# Altium PCB tsc2r.PcbDoc
Units mm, origin at the board's own origin, x right, y up, seen from the top; angles counter-clockwise.
Board outline 151 x 86.38 mm, 2 copper layers (Top Layer, Bottom Layer); 19 components, 21 nets, 67 pads, 0 vias.
Unrouted connection lines stored in the file: 14.
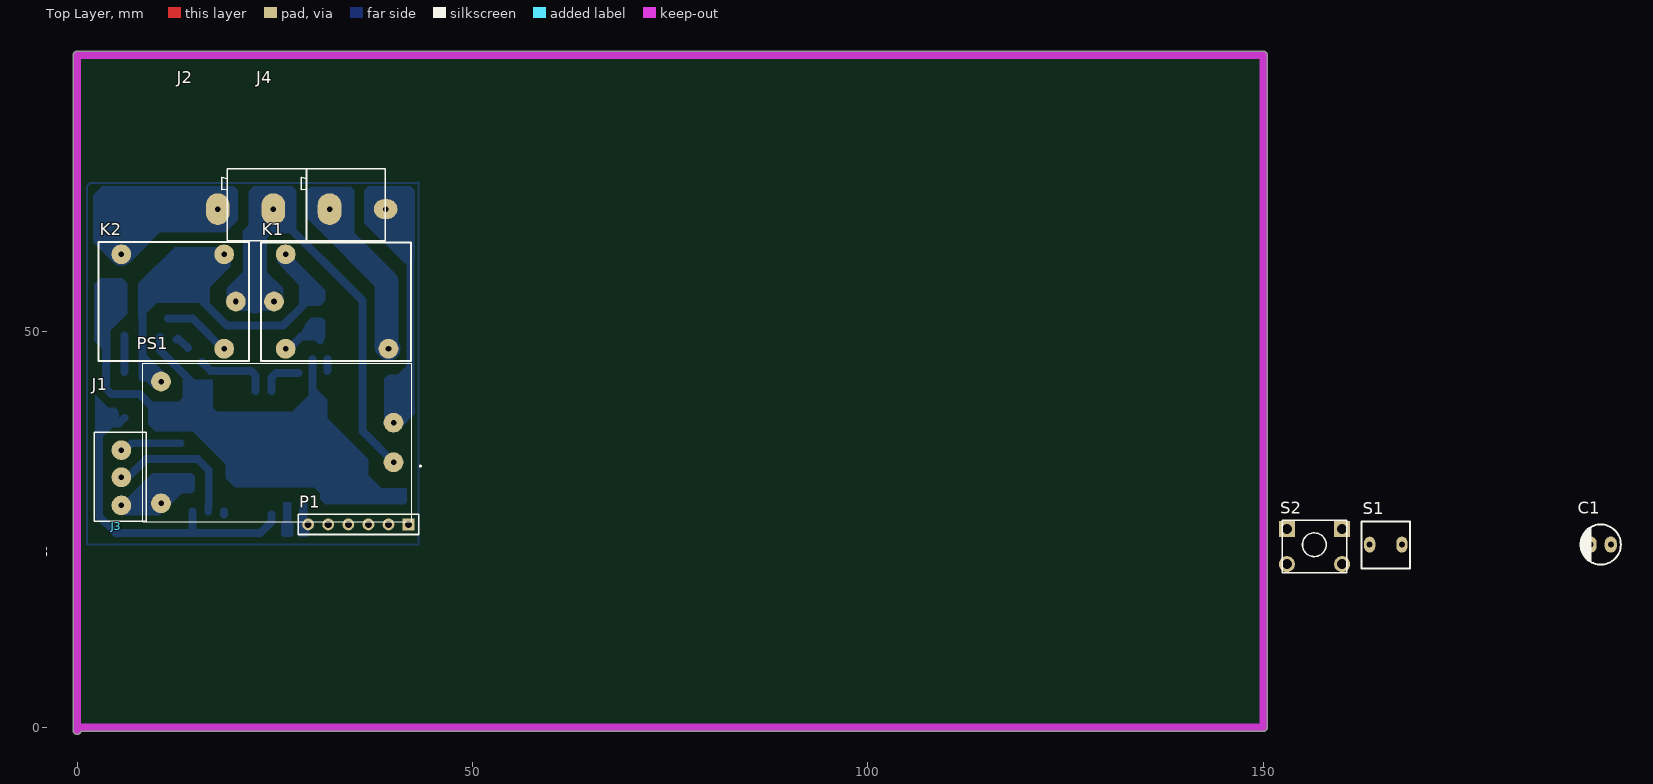
[diagram p0: Top Layer view]
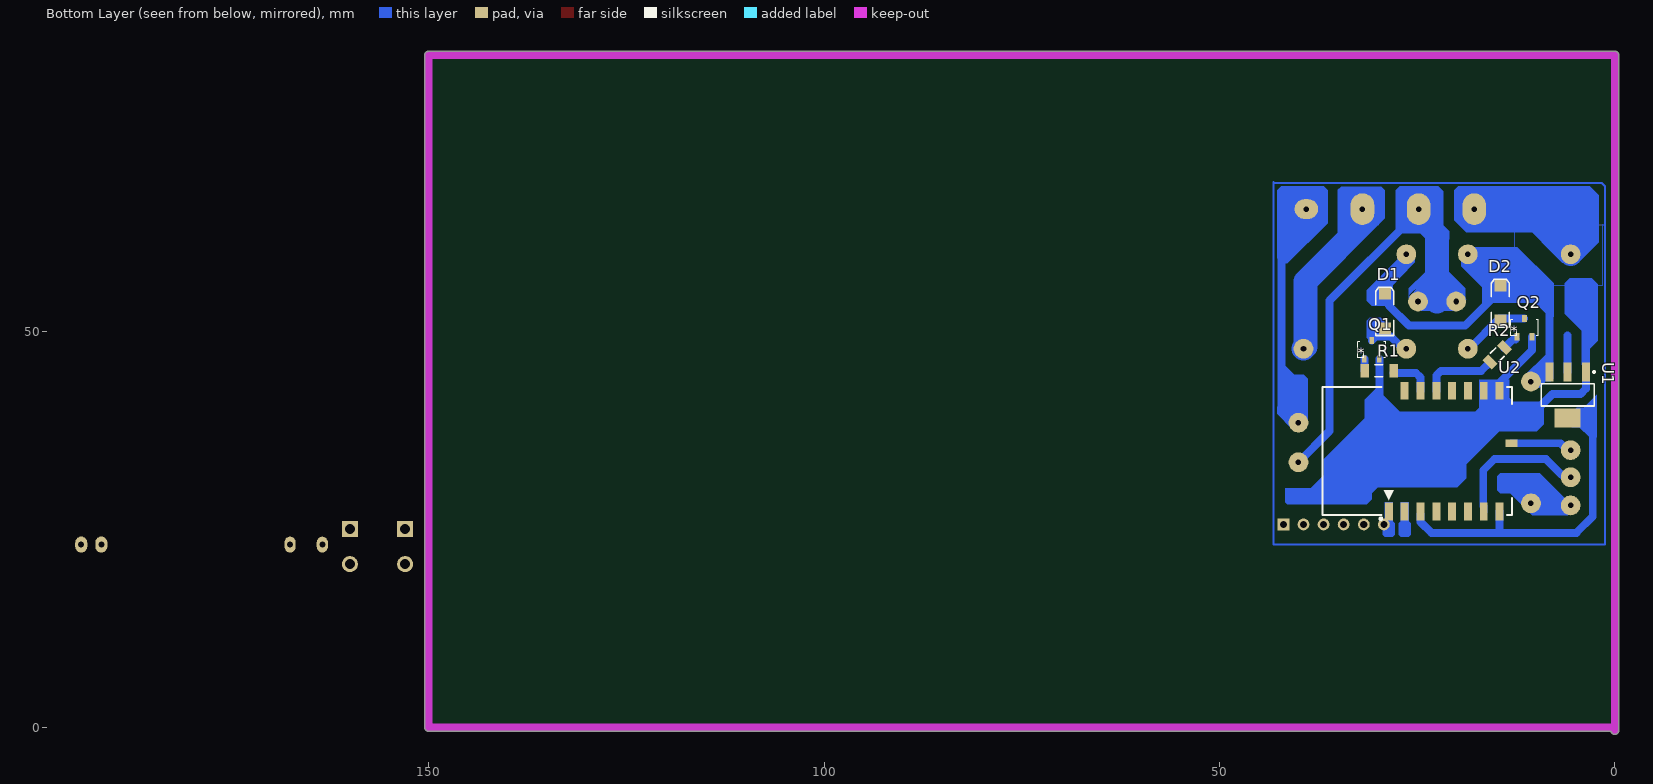
[diagram p1: Bottom Layer view, seen from below]

## Layer stack, top to bottom
Top Solder: solder mask 0.0102, Solder Resist, Dk 3.5
Top Layer: signal copper 0.0356
Dielectric 1: dielectric 0.32, FR-4, Dk 4.8
Bottom Layer: signal copper 0.0356
Bottom Solder: solder mask 0.0102, Solder Resist, Dk 3.5

## Board outline
-0.5,-0.381 -0.5,85 cw(c0,85) 0,85.5 150,85.5 cw(c150,85) 150.5,85 150.5,0 cw(c150,0) 150,-0.5 0.486,-0.5 cw(c0,-0.381)

## Design rules (kind name [scope] priority, off if disabled: settings)
Clearance Clearance_1 [InPolygon] p1: gap=0.8 ignorepadtopadclearanceinfootprint=FALSE
Clearance [All] p2: gap=0.254 ignorepadtopadclearanceinfootprint=FALSE except(0: Arc-Hole Track-Hole SMDPad-Hole THPad-Hole Via-Hole Fill-Hole Poly-Hole Region-Hole Text-Hole)
PolygonConnect [All] p1: connectstyle=Relief reliefconductorwidth=0.254 reliefentries=4 polygonreliefangle="90 Angle" airgapwidth=0.254
RoomDefinition tsc2r [InComponentClass('tsc2r')] p1: confinementstyle=ConfineIn formatcopy=TRUE lockcomponents=FALSE outline 144.907,-4.953 247.904,-4.953 247.904,23.114 144.907,23.114
RoutingLayers [All] p1: top layer_v5=FALSE bottom layer_v5=TRUE
RoutingVias [All] p1: holewidth=0.711 width=2.5 viastyle="Through Hole" minholewidth=0.711 minwidth=1.27 maxholewidth=0.711 maxwidth=2
SolderMaskExpansion [All] p1: expansion=0.102 istentingtop=FALSE
Width [All] p1: maxlimit=3 minlimit=0.5 preferedwidth=1
29 further rules are at their usual default settings.

## Components (designator, comment, footprint, x,y, rotation, side; value= is the part's Value field where it differs from the comment)
C1 "=Value" ELEC-CAP-RAD10-20 192.659,23.114 r0 top
D1 "D Tunnel1" 3.2X1.6X1.1 29.083,52.451 r90 bottom
D2 "D Tunnel1" 3.2X1.6X1.1 14.478,53.467 r90 bottom
J1 "TBlock-3" "KF300-3 PIN" 5.588,38.608 r0 top
J2 "TBlock-2" "KF300-2 PIN"#1 21.463,65.532 r90 top
J3 "TBlock-4" "KF300-4 PIN" 4.953,25.4 r180 top
J4 "TBlock-2" "KF300-2 PIN"#2 31.496,65.532 r90 top
K1 "Relay-12vDC" Relays 23.241,61.341 r270 top
K2 "Relay-12vDC" Relays 21.717,46.355 r90 top
P1 "Header 6" HDR1X6 41.91,25.654 r180 top
PS1 "HLK-PM01" HLKPM01 40.005,33.528 r180 top
Q1 "MMBT3904-TP" SOT23-3 32.004,47.745 r180 bottom
Q2 "MMBT3904-TP" SOT23-3 12.7,50.539 r180 bottom
R1 "10K" "RES 1206 (3216X08L)"#1 29.845,45.085 r0 bottom
R2 "10K" "RES 1206 (3216X08L)"#2 14.859,47.117 r135 bottom
S1 "PB-2pin" PB-2pin 162.433,20.066 r0 top
S2 "PUSH BUTTON DOUBLE" "PUSH BUTTON" 156.464,22.86 r0 top
U1 "LM1117MP-3.3" MP04A_N 5.969,42.037 r270 bottom
U2 "ESP_12_E" ESP_12_E 28.575,26.93 r90 bottom

## Footprints (in the part's own frame and the unit in brackets; to place one, negate y for a bottom-side part, rotate by r counter-clockwise, add the part's x,y. Pads: shape width x height; smd on the part's side, far side on the other; paste and mask are expansions set on the pad)
3.2X1.6X1.1 [mm] "SMT LED; 2 Flat Leads"
  rect 1.5x1.5 smd: 1(-2.032,0) 2(2.413,0)
  silkscreen extent -2.9,-1.15 3.2,1.15
ELEC-CAP-RAD10-20 [mil]
  oval 60x80 hole 30: 1(-50,0) 2(50,0)
  silkscreen extent -100,-100 100,100, body extent -124,-124 124,124, height 404
ESP_12_E [mm] "ESP-12 Wi-Fi Module by AI-Thinker"
  rect 2.25x1 smd: 1(0.375,0) 2(0.375,-2) 3(0.375,-4) 4(0.375,-6) 5(0.375,-8) 6(0.375,-10) 7(0.375,-12) 8(0.375,-14) 15(15.625,-14) 16(15.625,-12) 17(15.625,-10) 18(15.625,-8) 19(15.625,-6) 20(15.625,-4) 21(15.625,-2)
  rect 1x1.5 smd: 12(9,-15.5)
  silkscreen extent -0.7,-15.57 16.08,8.37, body extent 0,-15.49 16,8.51, height 2.75
HDR1X6 [mm] "Connector; Header; 6 Position"
  rect 1.5x1.5 hole 0.9: 1(0,0)
  round 1.5 hole 0.9: 2(2.54,0) 3(5.08,0) 4(7.62,0) 5(10.16,0) 6(12.7,0)
  silkscreen extent -1.27,-1.27 13.97,1.27
HLKPM01 [mm]
  round 2.5 hole 0.7: 1(0,0) 2(0,-5) 3(29.4,5.2) 4(29.4,-10.2)
  silkscreen extent -3.5,-12.5 31.7,7.5
"KF300-2 PIN"#1 [mm]
  oval 4x3 hole 0.7: 1(0,3.683) 2(0,-3.35)
  silkscreen extent -4.06,-7.49 5.08,3.18, body extent -3.99,-7.5 5.08,3.24, height 12.52
"KF300-2 PIN"#2 [mm]
  oval 4x3 hole 0.7: 1(0,-0.417)
  oval 2.5x3 hole 0.7: 2(0,-7.517)
  silkscreen extent -4.06,-7.49 5.08,3.18, body extent -3.99,-7.5 5.08,3.24, height 12.52
"KF300-3 PIN" [mm]
  round 2.5 hole 0.7: 1(0,-3.556) 2(0,-6.985) 3(0,-10.541)
  silkscreen extent -3.43,-12.57 3.17,-1.27, body extent -4,-12.57 5.07,3.25, height 12.78
"KF300-4 PIN" [mm]
MP04A_N [mm] "SOT223, 4-Leads, Body 6.5x3.5mm, Pitch 2.3mm, Lead Span 7mm, IPC Medium Density"
  rect 2.4x1 smd: 1(-2.9,2.3) 2(-2.9,0) 3(-2.9,-2.3)
  rect 2.4x3.3 smd: 4(2.9,0)
  silkscreen extent -3.02,-3.35 1.4,3.47, body extent -1.85,-3.35 1.85,3.35, height 1.8
PB-2pin [mil] "Switch"
  oval 55.12x78.74 hole 30: 1(40,120) 2(200,120)
  silkscreen extent 0,0 240,235
"PUSH BUTTON" [mil]
  rect 80x80 hole 50: 1(-137.5,87.5) 2(137.5,87.5)
  round 80 hole 50: 3(-137.5,-87.5) 4(137.5,-87.5)
  silkscreen extent -160,-130 160,130, body extent -155,-121 157,123, height 205
Relays [mm]
  round 2.5 hole 0.7: 1(7.493,1.651) 3(13.462,16.129) 4(1.524,3.127) 5(13.462,3.127)
  silkscreen extent 0,0 15,19
"RES 1206 (3216X08L)"#1 [mm] "Chip Resistor, 2-Leads, Body 3.2x1.6mm, IPC High Density _ (0.125 W)"
  rect 1.05x1.7 smd: 1(-1.905,0) 2(1.778,0)
  silkscreen extent -0.5,-0.75 0.5,0.75, body extent -1.52,-0.76 1.53,0.76, height 0.6
"RES 1206 (3216X08L)"#2 [mm] "Chip Resistor, 2-Leads, Body 3.2x1.6mm, IPC High Density _ (0.125 W)"
  rect 1.05x1.7 smd: 1(-1.295,0) 2(1.301,0)
  silkscreen extent -0.5,-0.75 0.5,0.75, body extent -1.52,-0.76 1.53,0.76, height 0.6
SOT23-3 [mm]
  rect 0.6x0.9 smd: 1(0.32,-1.15) 2(2.22,-1.15) 3(1.27,1.15)
  silkscreen extent -0.48,-1 3.02,1

## Part data
C1: library part "Capacitor Electrolytic", "Electrolytic Capacitor"
D1 D2: "Tunnel Diode - RLC Model", LatestRevisionDate=17-Jul-2002, LatestRevisionNote="Re-released for DXP Platform.", PackageDescription="SM LED; 2 Flat Leads", PackageReference=3.2X1.6X1.1, PackageVersion=Feb-2002, Published=8-Jun-2000, Publisher="Altium Limited"
K1 K2: library part Relay-05vDC, "Relay-05vDC-240AC 5A", ComponentLinkURL=www.picpars.com, Designer="Seyed Mohsen Ghasemain"
P1: "Header, 6-Pin", LatestRevisionDate=17-Jul-2002, LatestRevisionNote="Re-released for DXP Platform.", Publisher="Altium Limited"
PS1: "<b>Ultra-compact power module</b><p> Source: <a href=\"https://datasheet.lcsc.com/szlcsc/1906201102_HI-LINK-HLK-PM03_C209904.pdf\"> Datasheet </a>", Package="Package Analog Devices", Availability=Unavailable, MF=Hi-link, MP=hlk-pm01, Price=None, SnapEDA_Link=https://www.snapeda.com/parts/hlk-pm01/Hi-link/view-part/2875605/?ref=snap
Q1 Q2: "Bipolar _BJT_ Transistor NPN 40V 200mA 300MHz 350mW Surface Mount SOT-23", Package="SOT-23 Micro Commercial", Availability=Unavailable, MF="Micro Commercial", MP=MMBT3904-TP, Price=None, SnapEDA_Link=https://www.snapeda.com/parts/MMBT3904-TP/Micro%20Commercial/view-part/805928/?ref=snap
R1 R2: library part Resistor, "Resistor", Power="1/4 W", Tolerance=5%
S1 S2: "Switch"
  S1: Designer="Seyed Mohsen Ghasemian", E-mail=picpars@gmail.com, Publisher=www.picpars.com, WEB=www.picpars.com
U1: "800mA Low-Dropout Linear Regulator", DigiKeyPartNumber=LM1117MP-3.3CT-ND, Manufacturer="National Semiconductor", PackageTopMarking=XYTT*N05A, PowerWise=N, Code_IPC=SOT223-4, Code_JEDEC=TO-261-AA, ComponentLink1Description="LM1117 Datasheet", ComponentLink1URL=http://www.national.com/ds/LM/LM1117.pdf, ComponentLink2Description="LM1117 Web Page", ComponentLink2URL=http://www.national.com/pf/LM/LM1117.html, ComponentLink3Description="MP04A Package Page", ComponentLink3URL=http://www.national.com/packaging/folders/mp04a.html, CompType="LDO IC", DatasheetVersion=Apr-2006, PackageDescription="Molded SOT-223, 6.50 x 3.56 x 1.6mm Body, 4 Lead, 2.3mm Pitch", PackageReference=MP04A, PackageVersion="revB, Apr-2003", PartNumber=LM1117MP-3.3, PinCount=4, Published=4-Dec-2008, Publisher="Altium Limited", RoHS=O
U2: "ESP-12 Wi-Fi Module by AI-Thinker", IC=ESP8266-EX, Vendor=Ai-thinker

## Nets (pads, with @x,y where several pads share a name; then routed paths per layer and width w, separated by ;. In a path a pad name is that pad's centre, name@x,y a point inside that pad or via, vN(x,y) a via of type N, cw(c..) or ccw(c..) an arc to the next point about the centre after c; other vN are vias at no path point)
btn: S2.2 U2.18
faz: J2.2 K1.1 K2.1 PS1.1 | length 52.9
  Bottom Layer w1: 22.273,61.722 22.273,63.752 ; 22.479,61.722 24.43,63.673 24.43,64.213 24.813,64.596 J2.2 ; J2.2@24.619,64.596 25.088,64.127 25.438,64.478 25.565,64.478 36.068,53.975 36.068,37.465 PS1.1
  Bottom Layer w3: 22.479,53.848 22.479,61.722
GND: C1.2 J1.3 P1.2 PS1.3 Q1.2 Q2.2 S1.1 S2.4 U1.1 U2.15 U2.16 | length 58.8
  Bottom Layer w1: 3.669,48.768 U1.1 3.669,42.813 4.318,42.164 7.874,42.164 11.43,38.608 15.621,38.608 ; J1.3 5.719,28.198 10.475,28.198 PS1.3 ; Q2.2 10.48,47.686 14.575,43.591 U2.15 14.575,41.93 15.035,41.93 15.621,41.344 15.621,38.608 ; Q1.2 29.784,43.952 29.784,40.833 27.559,38.608 15.621,38.608
NetD1_1: D1.1 K1.5 Q1.3 | length 5.2
  Bottom Layer w1: K1.5 26.774,47.879 28.298,49.403 30.226,49.403 Q1.3
NetD2_1: D2.1 K2.4 Q2.3 | length 8.7
  Bottom Layer w1: Q2.3@11.498,51.689 13.642,51.689 13.646,51.685 D2.1@14.605,51.685 ; D2.1@14.605,51.689 18.415,47.879 K2.4
NetQ1_1: Q1.1 R1.2 | length 1.5
  Bottom Layer w1: R1.2 31.648,45.11 31.648,46.559 Q1.1
NetQ2_1: Q2.1 R2.2 | length 2.1
  Bottom Layer w1: Q2.1@12.573,49.022 12.721,49.17 R2.2@13.956,48.055 ; R2.2@13.956,48.055 14.024,47.994 R2.2@13.956,48.055
nol: J4.2 PS1.2 | length 30.1
  Bottom Layer w1: 36.957,65.532 42.164,60.325 42.164,40.687 PS1.2
o1: R2.1 U2.19 | length 9.5
  Bottom Layer w1: R2.1@15.729,46.12 15.793,46.183 16.891,45.085 21.989,45.085 22.575,44.499 U2.19
o2: R1.1 U2.20 | length 5.3
  Bottom Layer w1: U2.20 24.575,44.245 25.161,44.831 R1.1@27.965,44.831
o3: P1.4 U2.5
o4: P1.3 U2.6 | length 0.4
  Bottom Layer w1: U2.6@18.575,26.934 U2.6
q1: J4.1 K1.3 | length 21.7
  Bottom Layer w3: J4.1@30.943,66.067 30.943,64.561 39.116,56.388 39.116,48.133 K1.3
q2: J2.1 K2.3 | length 14.5
  Bottom Layer w3: K2.3 10.803,65.032 17.78,65.032 J2.1@17.78,65.151
rst: S1.2 U2.1
s1: J1.1 U2.12 | length 7.9
  Bottom Layer w1: J1.1 5.994,35.052 6.872,35.93 U2.12
s2: J1.2 U2.7 | length 17.8
  Bottom Layer w1: J1.2 5.875,31.91 6.703,31.91 8.702,33.909 15.24,33.909 16.637,32.512 16.637,27.992 16.575,27.93 U2.7
s3: P1.6 U2.2
s4: P1.5 U2.4
VCC: D1.2 D2.2 K1.4 K2.5 P1.1 PS1.4 U1.3 | length 49.3
  Bottom Layer w1: PS1.4 10.199,43.728 9.69,44.237 8.269,44.237 U1.3 8.269,52.592 11.557,55.88 D2.2 14.728,56.13 14.903,56.13 K2.5@19.177,59.944 ; 14.728,54.991 D2.2@14.728,55.503 ; 14.732,54.991 18.923,50.8 26.035,50.8 28.575,53.34 28.575,56.134 26.575,58.134 26.575,59.61 K1.4
vesp: C1.1 U1.2 U1.4 U2.3 U2.8 | length 45.8
  Bottom Layer w1: U1.4 5.269,38.437 4.274,38.437 2.794,36.957 2.794,26.67 4.869,24.595 14.605,24.595 ; U1.2 5.969,49.53 ; U2.8 14.575,26.387 14.605,26.357 14.605,24.595 ; U2.3@24.575,26.924 24.575,25.972 23.198,24.595 14.605,24.595
pads on no net: S2.1 S2.3 U2.17 U2.21
copper on no net: | length 175.2
  Bottom Layer w0.254: 1.27,23.114 1.27,68.453 1.651,68.834 43.053,68.834 43.18,68.961 43.18,68.834 43.18,23.114 1.27,23.114

## Polygon pours and split planes (outlines as drawn)
faz on Bottom Layer "NONET_L02_P003" (solid, shelved, pour order 3): 1.397,63.5 12.7,63.5 12.7,57.277 11.303,55.88 1.524,55.88 1.524,63.627
no net on Bottom Layer "NONET_L02_P001" (solid, pour order 1): 6.985,67.691

## Keep-outs
Keep-Out Layer:
  lines w1: 0,-0.381 0,22.86 0,67.945 0,85 150,85 150,0 0,0

## Other copper
Bottom Layer:
  region net NetD1_1: 28.956,51.181 29.591,51.816 30.988,51.816 31.369,51.435 31.369,49.276 31.115,49.022 28.575,49.022 28.154,49.443
  region net VCC: 26.162,57.912 25.273,58.801 25.273,59.182 25.4,59.182 26.924,60.706 27.432,60.198 27.432,59.182 31.369,55.245 31.369,53.975 30.734,53.34 29.083,53.34 28.067,54.356 28.067,55.912
  region net q2: 19.812,68.453 20.32,67.945 20.32,64.135 18.796,62.611 9.271,62.611 5.461,58.801 4.572,58.801 2.032,61.341 2.032,67.31 3.175,68.453
  region net faz: 27.178,62.611 27.051,62.484 24.638,62.484 23.622,61.468 21.209,61.468 20.955,61.722 20.955,62.738 21.844,63.627
  region: 25.019,66.929
  region net faz: 27.686,62.572 27.686,67.945 27.178,68.453 22.352,68.453 21.717,67.818 21.717,62.992 22.307,62.402
  region: 25.4,63.373
  region net q1: 35.032,62.147 35.032,67.965 34.615,68.382 29.52,68.382 29.083,67.945 29.083,64.389 32.004,61.468 34.455,61.468
  region net nol: 41.783,59.69 41.783,58.674 41.402,58.674 36.322,63.754 36.322,67.945 36.83,68.453 42.164,68.453 42.672,67.945 42.672,59.309 42.545,59.309 41.688,60.166
  region net nol: 39.243,62.611
  region net s3: 26.035,28.448 27.051,28.448 27.051,26.035 27.305,25.781 27.305,24.384 27.051,24.13 26.035,24.13 25.781,24.384 25.781,25.781 26.035,26.035
  region net rst: 28.067,28.448 29.083,28.448 29.083,26.035 29.337,25.781 29.337,24.384 29.083,24.13 28.067,24.13 27.813,24.384 27.813,25.781 28.067,26.035
  region net nol: 38.862,38.989 38.862,44.069 39.37,44.577 40.513,44.577 41.783,45.847 42.164,45.466 42.164,40.687 42.498,40.687 42.672,40.513 42.672,39.624 40.767,37.719
  region net faz: 24.74,55.905 26.035,54.61 25.654,54.229 25.654,53.213 25.019,53.213 24.511,52.705 20.066,52.705 20.066,52.832 18.796,54.102 18.923,54.229 18.923,55.499 20.955,57.531 24.003,57.531 26.035,55.499 26.035,54.229
  region net GND: 3.302,47.752 2.159,48.895 2.159,56.007 2.921,56.769 5.715,56.769 6.35,56.134 6.35,52.324 4.191,50.165 4.191,45.847
  region net VCC: 9.779,53.721 16.764,53.721 16.764,55.626 19.431,58.293 19.431,59.944 19.431,60.706 12.319,60.706 7.747,56.134 7.747,51.943
  region net VCC: 8.763,47.117 11.43,44.45 9.906,42.926 9.58,42.926 8.269,44.237
  region net vesp: 5.207,40.005 4.826,40.386 3.937,40.386 2.286,42.037 2.286,36.703 4.318,38.735 5.334,38.735
  region net GND: 6.223,28.956 6.35,28.956 9.525,32.131 14.478,32.131 14.859,31.75 14.859,29.972 14.478,29.591 13.208,29.591 10.414,26.797 5.969,26.797 4.715,28.051
  region net GND: 9.398,41.148 12.827,41.148 13.335,41.656 13.335,43.942 17.145,43.942 17.145,40.386 17.653,39.878 27.178,39.878 30.162,42.862 31.623,41.402 31.623,39.116 36.83,33.909 36.83,31.877 38.481,30.226 41.656,30.226 41.656,28.448 41.402,28.194 31.369,28.194 30.734,28.829 30.734,29.591 29.972,30.353 19.939,30.353 18.796,31.496 18.796,33.274 14.605,37.465 9.906,37.465 9.017,38.354 9.017,40.576

## Text inside footprints (layer, text, board x,y; h text height)
Q1: Bottom Overlay "*" at 32.484,46.745 h1.27
Q2: Bottom Overlay "*" at 13.18,49.539 h1.27
U2: Mechanical 13 "CUTOUT POLYGON" at 35.941,27.057 h0.25 r270; Mechanical 13 "ANTENNA AREA" at 36.449,27.057 h0.25 r270